# Altium PCB PCB_Robot_Version_1_2_2022-05-04.pcbdoc (part 2 of 2)
Units mil, origin at the board's own origin, x right, y up, seen from the top; angles counter-clockwise.
Board outline 7789.53 x 3844.65 mil, 2 copper layers (Top Layer, Bottom Layer); 136 components, 177 nets, 580 pads, 381 vias.
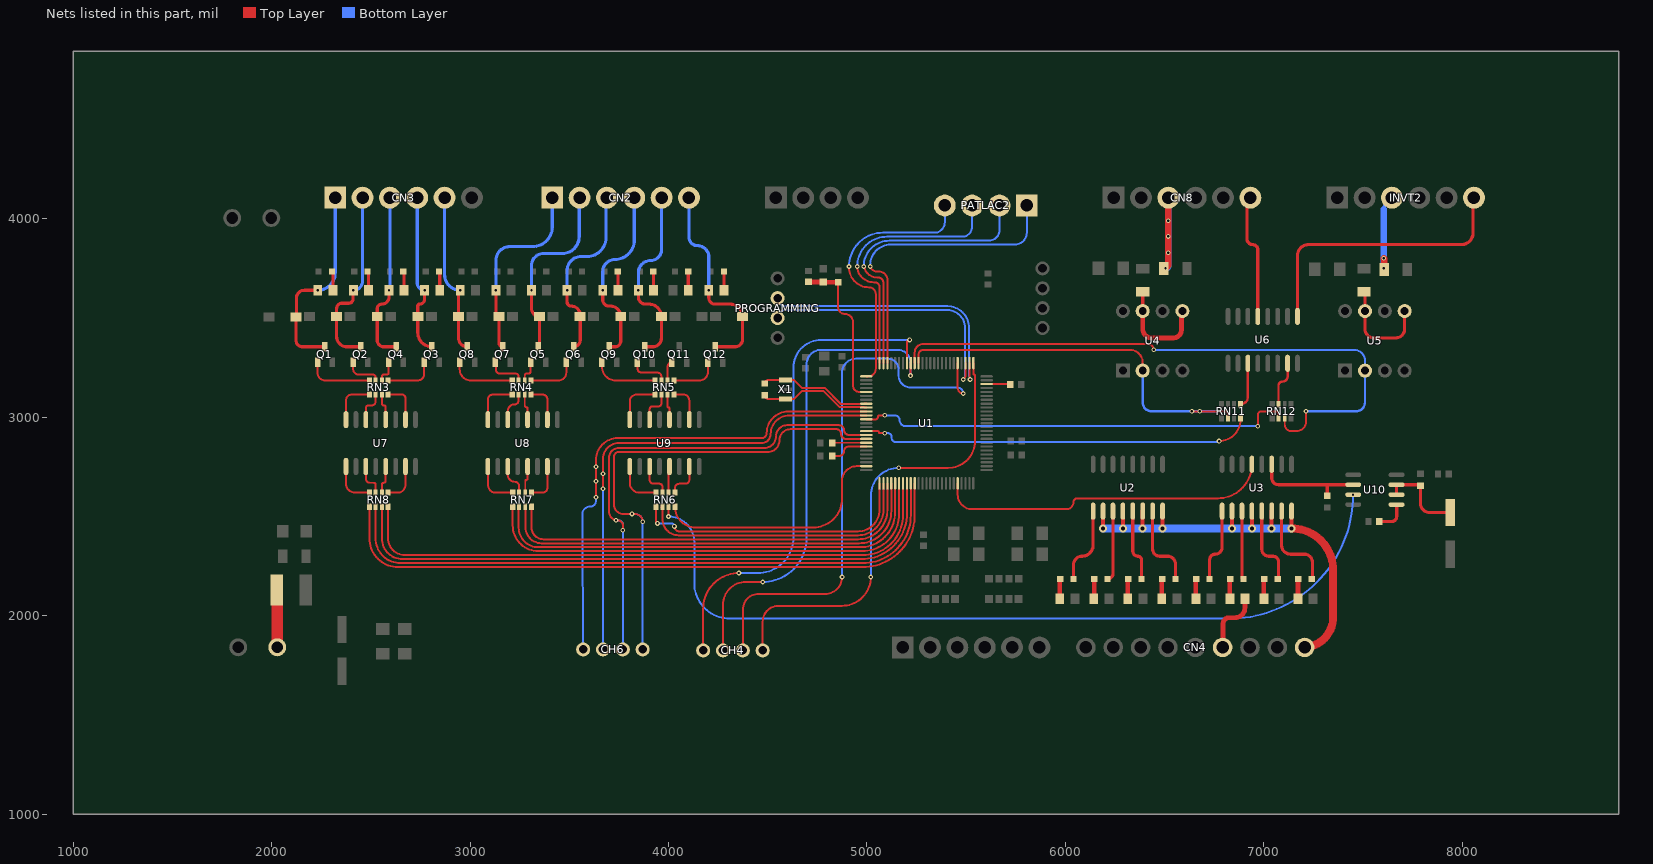
[diagram p2: the nets of this part, all layers, seen from the top]

## Via types
v1: diameter 24, hole 12, Top Layer to Bottom Layer, tented both sides, 310 vias
v2: diameter 32, hole 16, Top Layer to Bottom Layer, tented both sides, 26 vias
v3: diameter 48, hole 24, Top Layer to Bottom Layer, tented both sides, 24 vias
v4: diameter 40, hole 20, Top Layer to Bottom Layer, tented both sides, 21 vias

## Nets (pads, with @x,y where several pads share a name; then routed paths per layer and width w, separated by ;. In a path a pad name is that pad's centre, name@x,y a point inside that pad or via, vN(x,y) a via of type N, cw(c..) or ccw(c..) an arc to the next point about the centre after c; other vN are vias at no path point) (continued)
PHASE_LOSS_IN: R15.2 U3.11 U10.2 | length 553.4
  Top Layer w16: U3.11@7040.08,2762.75 7040.08,2694.65 ccw(c7075.08,2694.65) 7075.08,2659.65 7320.08,2659.65 ; R15.2@7320.08,2604.3 7320.08,2659.65 ; U10.2@7450.08,2659.65 7320.08,2659.65
PHASE_LOSS_OUT: RN6.3 U10.3 | length 4253.7
  Top Layer w10: v1(4000.08,2499.65) 4000.08,2548.47 cw(c4000.83,2548.47) RN6.3@4000.83,2549.21
  Bottom Layer w10: 4015.08,2499.65 v1(4000.08,2499.65) cw(c4000.08,2369.65) 4130.08,2369.65 4130.08,2286.42 4130.08,2164.65 ccw(c4310.08,2164.65) 4310.08,1984.65 6825.08,1984.65 ccw(c6825.08,2609.65) v1(7450.08,2609.65)
PIN_4: CH4.1 U1.1 | length 2308.6
  Top Layer w10: CH4.1@4475.08,1824.65 4475.08,1969.65 cw(c4555.08,1969.65) 4555.08,2049.65 4875.08,2049.65 ccw(c4875.08,2194.65) v1(5020.08,2194.65) ; v1(5160.08,2744.65) 5410.08,2744.65 ccw(c5410.08,2879.65) 5545.08,2879.65 5545.08,3019.65 5545.08,3204.65 5545.08,3209.65 ccw(c5540.08,3209.65) 5540.08,3214.65 cw(c5540.08,3218.43) 5536.3,3218.43 U1.1@5536.3,3272.8
  Bottom Layer w10: v1(5020.08,2194.65) 5020.08,2604.65 cw(c5160.08,2604.65) v1(5160.08,2744.65)
PIN_5: CH4.2 U1.5 | length 2760.8
  Top Layer w10: CH4.2@4375.08,1824.65 4375.08,2029.65 cw(c4455.08,2029.65) 4455.08,2109.65 4790.08,2109.65 ccw(c4790.08,2194.65) v1(4875.08,2194.65) ; U1.5@5457.56,3272.8 5457.56,3147.17 ccw(c5485.08,3147.17) v1(5485.08,3119.65)
  Bottom Layer w10: v1(4875.08,2194.65) 4875.08,3224.65 cw(c4945.08,3224.65) 4945.08,3294.65 5105.08,3294.65 cw(c5105.08,3239.65) 5160.08,3239.65 5160.08,3209.65 ccw(c5220.08,3209.65) 5220.08,3149.65 5350.08,3149.65 5455.08,3149.65 cw(c5455.08,3119.65) v1(5485.08,3119.65)
PIN_8: CH4.3 U1.17 | length 2450
  Top Layer w10: CH4.3@4275.08,1824.65 4275.08,2019.65 4275.08,2054.65 cw(c4390.08,2054.65) 4390.08,2169.65 v1(4475.08,2169.65) ; v1(5220.08,3209.65) 5220.08,3271.54 cw(c5221.34,3271.54) U1.17@5221.34,3272.8
  Bottom Layer w10: v1(4475.08,2169.65) ccw(c4475.08,2389.65) 4695.08,2389.65 4695.08,2929.65 4695.08,3264.65 cw(c4770.08,3264.65) 4770.08,3339.65 5155.08,3339.65 cw(c5155.08,3274.65) 5220.08,3274.65 v1(5220.08,3209.65)
PIN_9: CH4.4 U1.18 | length 2514.9
  Top Layer w10: CH4.4@4175.08,1824.65 4175.08,2034.65 cw(c4355.08,2034.65) v1(4355.08,2214.65) ; U1.18@5201.65,3272.8 5201.65,3376.22 cw(c5215.08,3376.22) v1(5215.08,3389.65)
  Bottom Layer w10: v1(4355.08,2214.65) 4450.08,2214.65 ccw(c4450.08,2394.65) 4630.08,2394.65 4630.08,3249.65 cw(c4770.08,3249.65) 4770.08,3389.65 v1(5215.08,3389.65)
PIN_10: PATLAC2.1 U1.23 | length 1591.2
  Top Layer w10: v1@5015.97,3761.82 ccw(c5050.08,3769.65) 5050.08,3734.65 5060.08,3734.65 cw(c5060.08,3691.5) 5103.23,3691.5 5103.23,3677.71 U1.23@5103.23,3272.8
  Bottom Layer w10: v1(5016.48,3759.65) 5016.48,3766.05 cw(c5120.08,3766.05) 5120.08,3869.65 5745.08,3869.65 ccw(c5745.08,3930.53) 5805.96,3930.53 PATLAC2.1@5805.96,4088.39
PIN_11: PATLAC2.2 U1.24 | length 1479.9
  Top Layer w10: v1@4985.81,3759.94 ccw(c5050.08,3769.65) 5050.08,3704.65 5055.08,3704.65 cw(c5055.08,3676.19) 5083.54,3676.19 U1.24@5083.54,3272.8
  Bottom Layer w10: v1(4983.88,3759.65) cw(c5113.88,3759.65) 5113.88,3889.65 5120.08,3889.65 5615.08,3889.65 ccw(c5615.08,3942.71) 5668.14,3942.71 PATLAC2.2@5668.14,4088.39
PIN_12: PATLAC2.3 U1.25 | length 1380.8
  Top Layer w10: v1@4950.08,3764.65 ccw(c5035.08,3764.65) 5035.08,3679.65 5040.08,3679.65 cw(c5040.08,3655.87) 5063.86,3655.87 U1.25@5063.86,3272.8
  Bottom Layer w10: v1(4951.28,3759.65) cw(c5101.28,3759.65) 5101.28,3909.65 5115.08,3909.65 5480.08,3909.65 ccw(c5480.08,3959.92) 5530.35,3959.92 PATLAC2.3@5530.35,4088.39
PIN_13: PATLAC2.4 U1.26 | length 1373.1
  Top Layer w10: v1@4910.08,3754.23 ccw(c5009.87,3754.23) 5009.87,3654.44 ccw(c5009.87,3654.65) 5010.08,3654.65 cw(c5010.08,3619.65) 5045.08,3619.65 5045.08,3569.65 5045.08,3339.65 5045.08,3299.65 5045.08,3244.65 cw(c5006.3,3244.65) 5006.3,3205.87 U1.26@4996.93,3205.87
  Bottom Layer w10: v1(4910.08,3759.65) cw(c5080.08,3759.65) 5080.08,3929.65 5120.08,3929.65 5340.08,3929.65 ccw(c5340.08,3982.13) 5392.56,3982.13 PATLAC2.4@5392.56,4088.39
PIN_42: CH6.1 U1.42 | length 2539.7
  Top Layer w10: 3766.36,2512.96 ccw(c3766.72,2512.96) 3766.72,2512.61 3794.89,2512.61 v1(3816.22,2512.61) 3831.04,2512.61 cw(c3831.04,2473.57) v1(3870.08,2473.57) ; 3772.12,2512.61 cw(c3772.12,2559.65) 3725.08,2559.65 3725.08,2799.65 cw(c3750.08,2799.65) 3750.08,2824.65 4425.08,2824.65 4500.08,2824.65 ccw(c4500.08,2884.65) 4560.08,2884.65 cw(c4615.08,2884.65) 4615.08,2939.65 4685.08,2939.65 4845.08,2939.65 cw(c4845.08,2914.65) 4870.08,2914.65 ccw(c4893.82,2914.65) 4893.82,2890.91 U1.42@4996.93,2890.91
  Bottom Layer w10: v1(3816.22,2512.61) 3831.04,2512.61 cw(c3831.04,2473.57) v1(3870.08,2473.57) CH6.1@3870.08,1829.65
PIN_43: CH6.2 U1.41 | length 2500.1
  Top Layer w10: v1(3770.08,2429.95) 3770.08,2454.65 ccw(c3745.08,2454.65) 3745.08,2479.65 cw(c3745.08,2524.65) 3700.08,2524.65 3700.08,2531.61 3700.08,2794.65 cw(c3750.08,2794.65) 3750.08,2844.65 4407.65,2844.65 4482.65,2844.65 ccw(c4482.65,2904.65) 4542.65,2904.65 cw(c4597.65,2904.65) 4597.65,2959.65 4667.65,2959.65 4827.65,2959.65 4860.08,2959.65 cw(c4860.08,2934.65) 4885.08,2934.65 ccw(c4909.13,2934.65) 4909.13,2910.6 U1.41@4996.93,2910.59
  Bottom Layer w10: v1(3735.68,2480.64) ccw(c3736.67,2480.64) 3736.67,2479.65 3750.08,2479.65 cw(c3750.08,2459.65) 3770.08,2459.65 v1(3770.08,2429.95) CH6.2@3770.08,1829.65
PIN_48: CH6.3 U1.36 | length 2487.1
  Top Layer w10: v1(3670.08,2639.65) v1(3670.08,2714.65) 3670.08,2789.65 cw(c3750.08,2789.65) 3750.08,2869.65 4470.08,2869.65 ccw(c4470.08,2914.65) 4515.08,2914.65 cw(c4609.45,2914.65) 4609.45,3009.02 U1.36@4996.93,3009.02
  Bottom Layer w10: CH6.3@3670.08,1829.65 v1(3670.08,2639.65) v1(3670.08,2714.65)
PIN_49: CH6.4 U1.35 | length 2828.2
  Top Layer w10: v1@3635.08,2593.11 3635.08,2609.65 ; v1(3635.08,2596.18) v1(3635.08,2750.47) 3635.08,2784.65 cw(c3745.08,2784.65) 3745.08,2894.65 4410.08,2894.65 4470.08,2894.65 ccw(c4470.08,2919.65) 4495.08,2919.65 cw(c4604.14,2919.65) 4604.14,3028.71 U1.35@4996.93,3028.7
  Bottom Layer w10: CH6.4@3570.08,1822.15 3565.98,2467.15 3565.98,2510.55 cw(c3605.08,2510.55) 3605.08,2549.65 ccw(c3605.08,2579.65) 3635.08,2579.65 v1(3635.08,2750.47) v1(3635.08,2677.22) v1(3635.08,2596.18)
POW_OUT1: CN3.1 D2.1 Q1.3 R35.2 | length 1004.2
  Top Layer w16: v1(2232.86,3639.65) 2165.08,3639.65 ccw(c2165.08,3599.65) 2125.08,3599.65 2125.08,3506.34 cw(c2123.39,3506.34) D2.1@2123.38,3504.65 2123.39,3386.34 ccw(c2155.08,3386.34) 2155.08,3354.65 2268.23,3354.65 ccw(c2268.23,3355.51) Q1.3@2269.09,3355.51
  Bottom Layer w16: v1(2232.86,3639.65) ccw(c2232.86,3727.38) 2320.59,3727.38 CN3.1@2320.59,4084.65
POW_OUT2: CN3.2 D3.1 Q2.3 R36.2 | length 917.8
  Top Layer w16: v1(2412.37,3639.65) ccw(c2412.37,3637.36) 2410.08,3637.36 2410.08,3594.65 cw(c2390.08,3594.65) 2390.08,3574.65 2355.08,3574.65 ccw(c2355.08,3547.5) 2327.93,3547.5 D3.1@2327.93,3507.15 2327.93,3406.79 ccw(c2380.08,3406.79) 2380.08,3354.65 2447.32,3354.65 ccw(c2447.32,3355.51) Q2.3@2448.18,3355.51
  Bottom Layer w16: v1(2412.37,3639.65) ccw(c2412.37,3685.67) 2458.39,3685.67 CN3.2@2458.39,4084.65
POW_OUT3: CN3.3 D4.1 Q4.3 R37.2 | length 847.6
  Top Layer w16: v1(2591.87,3639.65) 2591.87,3606.44 cw(c2555.08,3606.44) 2555.08,3569.65 ccw(c2555.08,3547.05) 2532.48,3547.05 D4.1@2532.47,3507.15 2532.48,3387.25 ccw(c2565.08,3387.25) 2565.08,3354.65 2626.41,3354.65 ccw(c2626.41,3355.51) Q4.3@2627.27,3355.51
  Bottom Layer w16: v1(2591.87,3639.65) ccw(c2591.87,3643.95) 2596.18,3643.95 CN3.3@2596.18,4084.65
POW_OUT4: CN3.4 D5.1 Q3.3 R38.2 | length 809.7
  Top Layer w16: v1(2771.37,3639.65) 2771.37,3595.94 cw(c2745.08,3595.94) 2745.08,3569.65 ccw(c2745.08,3561.59) 2737.02,3561.59 D5.1@2737.02,3507.15 2737.02,3424.84 ccw(c2806.36,3424.84) Q3.3@2806.36,3355.51
  Bottom Layer w16: CN3.4@2733.98,4084.65 2733.98,4018.45 2733.98,3677.05 ccw(c2771.37,3677.04) v1(2771.37,3639.65)
POW_OUT5: CN3.5 D6.1 Q8.3 R24.2 | length 804.7
  Top Layer w16: v1(2950.88,3639.65) ccw(c2950.88,3630.34) 2941.57,3630.34 D6.1@2941.56,3507.15 2941.57,3399.39 ccw(c2985.45,3399.39) Q8.3@2985.45,3355.51
  Bottom Layer w16: CN3.5@2871.77,4084.65 2871.77,3718.76 ccw(c2950.88,3718.76) v1(2950.88,3639.65)
POW_OUT6: CN2.1 D7.1 Q7.3 R23.2 | length 960.2
  Top Layer w16: v1(3130.39,3639.65) 3130.39,3522.88 ccw(c3146.12,3522.88) D7.1@3146.11,3507.15 3146.12,3373.94 ccw(c3164.55,3373.94) Q7.3@3164.55,3355.51
  Bottom Layer w16: v1(3130.39,3639.65) 3130.39,3789.95 cw(c3200.08,3789.95) 3200.08,3859.65 3315.08,3859.65 ccw(c3315.08,3959.09) 3414.52,3959.09 CN2.1@3414.52,4084.65
POW_OUT7: CN2.2 D8.1 Q5.3 R22.2 | length 935.6
  Top Layer w16: v1(3309.89,3639.65) 3309.89,3547.92 ccw(c3350.66,3547.92) D8.1@3350.66,3507.15 3350.66,3362.53 cw(c3343.64,3362.53) Q5.3@3343.64,3355.51
  Bottom Layer w16: v1(3309.89,3639.65) 3309.89,3764.45 cw(c3370.08,3764.45) 3370.08,3824.65 3465.08,3824.65 ccw(c3465.08,3909.65) 3550.08,3909.65 3550.08,4082.4 cw(c3552.33,4082.4) CN2.2@3552.33,4084.65
POW_OUT8: CN2.3 D9.1 Q6.3 R21.2 | length 905.3
  Top Layer w16: v1(3489.4,3639.65) 3489.39,3580.33 ccw(c3510.08,3580.33) 3510.08,3559.65 cw(c3510.08,3514.52) D9.1@3555.21,3514.52 ; Q6.3@3522.73,3355.51 ccw(c3522.73,3387.99) 3555.21,3387.99 D9.1@3555.2,3507.15
  Bottom Layer w16: v1(3489.4,3639.65) 3489.39,3738.96 cw(c3560.08,3738.96) 3560.08,3809.65 3590.08,3809.65 ccw(c3590.08,3904.65) 3685.08,3904.65 3685.08,4079.61 cw(c3690.12,4079.61) CN2.3@3690.12,4084.65
POW_OUT9: CN2.4 D10.1 Q9.3 R47.2 | length 921.4
  Top Layer w16: v1(3668.9,3639.65) 3668.89,3590.83 ccw(c3700.08,3590.83) 3700.08,3559.65 3707.25,3559.65 cw(c3707.25,3507.15) 3759.75,3507.15 3759.75,3384.32 cw(c3730.08,3384.32) 3730.08,3354.65 3702.68,3354.65 cw(c3702.68,3355.51) Q9.3@3701.82,3355.51
  Bottom Layer w16: v1(3668.9,3639.65) 3668.89,3733.46 cw(c3730.08,3733.46) 3730.08,3794.65 ccw(c3730.08,3892.49) 3827.92,3892.49 CN2.4@3827.92,4084.65
POW_OUT10: CN2.5 D11.1 Q10.3 R48.2 | length 935.2
  Top Layer w16: v1(3848.4,3639.65) 3848.4,3606.32 ccw(c3885.08,3606.32) 3885.08,3569.65 3901.8,3569.65 cw(c3901.8,3507.15) D11.1@3964.29,3507.15 3964.3,3398.87 cw(c3920.08,3398.87) 3920.08,3354.65 3881.76,3354.65 cw(c3881.76,3355.51) Q10.3@3880.9,3355.51
  Bottom Layer w16: v1(3848.4,3639.65) 3848.4,3727.97 cw(c3910.08,3727.97) 3910.08,3789.65 ccw(c3910.08,3845.28) 3965.71,3845.28 CN2.5@3965.71,4084.65
POWDER_OUT1: RN8.1 U1.60 | length 3300.2
  Top Layer w10: RN8.1@2492.84,2549.22 2492.84,2389.22 ccw(c2637.41,2389.22) 2637.41,2244.65 2825.08,2244.65 4979.17,2244.65 ccw(c4979.17,2506.5) 5241.02,2506.5 U1.60@5241.02,2666.5
POWDER_OUT2: RN8.2 U1.59 | length 3230.6
  Top Layer w10: 2524.33,2389.22 ccw(c2648.9,2389.22) 2648.9,2264.65 4770.08,2264.65 4979.49,2264.65 ccw(c4979.49,2506.5) 5221.34,2506.5 U1.59@5221.34,2666.5 ; RN8.2@2524.33,2549.21 2524.33,2384.88 ccw(c2524.41,2384.88) 2524.41,2384.8
POWDER_OUT3: RN8.3 U1.58 | length 3156
  Top Layer w10: RN8.3@2555.83,2549.21 2555.83,2389.22 ccw(c2660.4,2389.22) 2660.4,2284.65 4720.08,2284.65 4979.8,2284.65 ; 4973,2284.65 ccw(c4973,2513.3) 5201.65,2513.3 U1.58@5201.65,2666.5
POWDER_OUT4: RN8.4 U1.57 | length 3078.1
  Top Layer w10: RN8.4@2587.32,2549.21 2587.32,2389.22 ccw(c2671.89,2389.22) 2671.89,2304.65 2720.08,2304.65 4980.12,2304.65 ccw(c4980.12,2506.5) 5181.97,2506.5 U1.57@5181.97,2666.5
POWDER_OUT5: RN7.1 U1.56 | length 2377.6
  Top Layer w10: RN7.1@3215.34,2549.22 ccw(c3215.34,2548.96) 3215.08,2548.96 3215.08,2454.65 ccw(c3345.08,2454.65) 3345.08,2324.65 4975.08,2324.65 ccw(c4975.08,2511.85) 5162.28,2511.85 U1.56@5162.28,2666.5
POWDER_OUT6: RN7.2 U1.55 | length 2305.8
  Top Layer w10: RN7.2@3246.83,2549.21 ccw(c3246.83,2547.47) 3245.08,2547.47 3245.08,2444.65 ccw(c3345.08,2444.65) 3345.08,2344.65 4965.08,2344.65 ccw(c4965.08,2522.17) 5142.6,2522.17 U1.55@5142.6,2666.5
POWDER_OUT7: RN7.3 U1.54 | length 2226
  Top Layer w10: RN7.3@3278.33,2549.21 cw(c3278.33,2547.47) 3280.08,2547.47 3280.08,2444.65 ccw(c3360.08,2444.65) 3360.08,2364.65 4960.08,2364.65 ccw(c4960.08,2527.48) 5122.91,2527.48 U1.54@5122.91,2666.5
POWDER_OUT8: RN7.4 U1.53 | length 2150.4
  Top Layer w10: RN7.4@3309.82,2549.21 cw(c3309.82,2548.96) 3310.08,2548.96 3310.08,2444.65 ccw(c3370.08,2444.65) 3370.08,2384.65 4955.08,2384.65 ccw(c4955.08,2532.8) 5103.23,2532.8 U1.53@5103.23,2666.5
POWDER_OUT9: RN6.1 U1.51 | length 1447.1
  Top Layer w10: RN6.1@3937.84,2549.22 3937.84,2471.89 ccw(c3945.08,2471.89) v1(3945.08,2464.65) ; v1(4030.08,2449.65) ccw(c4055.08,2449.65) 4055.08,2424.65 4086.71,2424.65 ; 4075.08,2424.65 4120.08,2424.65 4955.08,2424.65 ccw(c4955.08,2533.43) 5063.86,2533.43 U1.51@5063.86,2666.5
  Bottom Layer w10: v1@3955.08,2464.65 v1(3945.08,2464.65) 4015.08,2464.65 cw(c4015.08,2449.65) v1(4030.08,2449.65)
POWDER_OUT10: RN6.2 U1.52 | length 1443.5
  Top Layer w10: U1.52@5083.54,2666.5 5083.54,2533.11 cw(c4955.08,2533.11) 4955.08,2404.65 4051.76,2404.65 cw(c4051.76,2487.07) 3969.33,2487.07 RN6.2@3969.33,2549.21 ; RN6.2@3969.33,2549.21 ccw(c3969.33,2544.97) 3965.08,2544.97 cw(c3969.33,2544.97) RN6.2@3969.33,2549.21
PWM_1: RN11.2 U1.15 U4.2 | length 2064.1
  Top Layer w10: U1.15@5260.71,3272.8 5260.71,3315.28 cw(c5285.08,3315.28) 5285.08,3339.65 6325.08,3339.65 cw(c6325.08,3274.65) 6390.08,3274.65 U4.2@6390.08,3234.65 ; v1(6638.05,3029.65) v1(6678.05,3029.65) 6805.08,3029.65 cw(c6805.08,3015.4) 6819.33,3015.4 RN11.2@6819.33,2994.21
  Bottom Layer w12: U4.2@6390.08,3234.65 6390.08,3074.65 ccw(c6435.08,3074.65) 6435.08,3029.65 v1(6638.05,3029.65) v1(6678.05,3029.65) 6795.08,3029.65
PWM_2: RN12.3 U1.16 U5.2 | length 3166.1
  Top Layer w10: U1.16@5241.02,3272.8 5241.02,3325.59 cw(c5285.08,3325.59) 5285.08,3369.65 5295.08,3369.65 5445.08,3369.65 6025.08,3369.65 6415.08,3369.65 cw(c6415.08,3339.65) v1(6445.08,3339.65) ; RN12.3@7105.83,2994.21 7105.83,2963.9 ccw(c7140.08,2963.9) 7140.08,2929.65 7165.08,2929.65 ccw(c7165.08,2977.26) 7212.69,2977.26 v1(7212.69,3029.65)
  Top Layer w12: RN12.3@7105.08,2993.47 cw(c7105.83,2993.47) RN12.3@7105.83,2994.21
  Bottom Layer w10: v1(6445.08,3339.65) 7455.08,3339.65 cw(c7455.08,3284.65) 7510.08,3284.65 U5.2@7510.08,3234.65
  Bottom Layer w12: v1(7212.69,3029.65) 7465.08,3029.65 ccw(c7465.08,3074.65) 7510.08,3074.65 U5.2@7510.08,3234.65
Q1_1: Q1.1 RN3.8 | length 347.5
  Top Layer w10: Q1.1@2231.68,3276.77 2231.69,3223.04 ccw(c2270.08,3223.04) 2270.08,3184.65 2333.45,3184.65 ccw(c2333.45,3185.08) 2333.88,3185.08 ; 2323.38,3185.08 RN3.8@2492.84,3185.08
Q5_1: Q5.1 RN4.6 | length 113.3
  Top Layer w10: RN4.6@3275.83,3185.08 3275.83,3210.4 cw(c3285.08,3210.4) 3285.08,3219.65 3295.08,3219.65 ccw(c3295.08,3229.65) 3305.08,3229.65 3305.08,3275.61 cw(c3306.24,3275.61) Q5.1@3306.24,3276.77
Q6_1: Q6.1 RN4.5 | length 252.6
  Top Layer w10: RN4.5@3307.32,3185.07 3445.51,3185.08 ccw(c3445.51,3224.65) 3485.08,3224.65 3485.08,3276.52 cw(c3485.33,3276.52) Q6.1@3485.32,3276.77
Q7_1: Q7.1 RN4.7 | length 194.1
  Top Layer w10: Q7.1@3127.14,3276.77 cw(c3127.15,3273.84) 3130.08,3273.84 3130.08,3239.65 ccw(c3150.08,3239.65) 3150.08,3219.65 3230.08,3219.65 cw(c3230.08,3205.4) 3244.33,3205.4 RN4.7@3244.33,3185.08 ccw(c3244.33,3185.83) RN4.7@3245.08,3185.83
Q9_1: Q9.1 RN5.8 | length 330.5
  Top Layer w10: Q9.1@3664.41,3276.77 3664.42,3255.31 ccw(c3735.08,3255.31) 3735.08,3184.65 3932.41,3184.65 ccw(c3932.41,3185.08) RN5.8@3932.84,3185.08
R5_2: LED13.1 R5.2 | length 101.4
  Top Layer w24: R5.2@5972.04,2084.65 5972.04,2182.25 cw(c5974.44,2182.25) LED13.1@5974.44,2184.65
R6_2: LED14.1 R6.2 | length 101.4
  Top Layer w24: R6.2@6143.47,2084.65 ccw(c6143.47,2087.05) 6145.87,2087.05 LED14.1@6145.86,2184.65
R7_2: LED15.1 R7.2 | length 101.4
  Top Layer w24: R7.2@6314.89,2084.65 6314.9,2182.26 cw(c6317.29,2182.26) LED15.1@6317.29,2184.65
R8_2: LED16.1 R8.2 | length 101.4
  Top Layer w24: R8.2@6486.32,2084.65 6486.33,2182.26 cw(c6488.72,2182.26) LED16.1@6488.72,2184.65
R9_1: LED11.1 R9.1 | length 95.3
  Top Layer w16: R9.1@4099.48,3639.65 4099.48,3734.19 cw(c4099.94,3734.19) LED11.1@4099.94,3734.65
R10_1: LED12.1 R10.1 | length 95
  Top Layer w16: LED12.1@4279.45,3734.65 cw(c4279.45,3734.61) 4279.48,3734.61 R10.1@4279.48,3639.65
R30_2: LED20.1 R30.2 | length 101.4
  Top Layer w24: R30.2@6657.75,2084.65 6657.75,2182.25 cw(c6660.15,2182.25) LED20.1@6660.15,2184.65
R33_2: R33.2 U5.5 U5.7 | length 531
  Top Layer w16: R33.2@7505.08,3631.43 cw(c7505.08,3626.43) 7510.08,3626.43 U5.7@7510.08,3534.65 7510.08,3444.65 ccw(c7555.08,3444.65) 7555.08,3399.65 7665.08,3399.65 ccw(c7665.08,3444.65) 7710.08,3444.65 U5.5@7710.08,3534.65
R34_2: R34.2 U4.5 U4.7 | length 528.2
  Top Layer w16: U4.7@6390.08,3534.65 R34.2@6390.08,3631.43
  Top Layer w24: U4.7@6390.08,3534.65 6390.08,3444.65 ccw(c6435.08,3444.65) 6435.08,3399.65 6545.08,3399.65 ccw(c6545.08,3439.65) 6585.08,3439.65 6585.08,3529.65 cw(c6590.08,3529.65) U4.5@6590.08,3534.65
R35_1: LED1.1 R35.1 | length 97.9
  Top Layer w16: LED1.1@2303.95,3734.65 cw(c2303.95,3729.65) 2308.95,3729.65 R35.1@2308.95,3639.65
R36_1: LED2.1 R36.1 | length 97.6
  Top Layer w16: LED2.1@2483.95,3734.65 cw(c2483.95,3730.14) 2488.46,3730.14 R36.1@2488.45,3639.65
R37_1: LED3.1 R37.1 | length 97.3
  Top Layer w16: LED3.1@2663.95,3734.65 cw(c2663.95,3730.64) 2667.95,3730.64 R37.1@2667.96,3639.65
R38_1: LED4.1 R38.1 | length 97
  Top Layer w16: LED4.1@2843.95,3734.65 cw(c2843.95,3731.13) 2847.46,3731.13 R38.1@2847.46,3639.65
R41_2: LED19.1 R41.2 | length 101.4
  Top Layer w24: R41.2@6829.18,2084.65 6829.18,2182.25 cw(c6831.58,2182.25) LED19.1@6831.58,2184.65
R42_2: LED17.1 R42.2 | length 101.4
  Top Layer w24: R42.2@7000.61,2084.65 7000.61,2182.25 cw(c7003.01,2182.25) LED17.1@7003.01,2184.65
R45_2: LED18.1 R45.2 | length 101.4
  Top Layer w24: R45.2@7172.04,2084.65 7172.04,2182.25 cw(c7174.44,2182.25) LED18.1@7174.44,2184.65
R47_1: LED9.1 R47.1 | length 95.6
  Top Layer w16: LED9.1@3743.95,3734.65 cw(c3743.95,3733.61) 3744.99,3733.61 R47.1@3744.98,3639.65
R48_1: LED10.1 R48.1 | length 95.3
  Top Layer w16: LED10.1@3923.95,3734.65 cw(c3923.95,3734.11) 3924.48,3734.11 R48.1@3924.49,3639.65
RESET: C7.1 D1.2 R2.1 U1.30 | length 799.8
  Top Layer w10: R2.1@4855.08,3679.99 4855.08,3554.65 ccw(c4890.08,3554.65) 4890.08,3519.65 cw(c4890.08,3479.65) 4930.08,3479.65 4930.08,3399.65 4930.08,3159.65 ccw(c4962.6,3159.65) 4962.6,3127.13 U1.30@4996.93,3127.13
  Top Layer w24: C7.1@4705.08,3682.09 ccw(c4705.99,3682.09) 4705.99,3681.18 D1.2@4780.08,3681.18 ccw(c4781.27,3681.18) 4781.27,3679.99 R2.1@4855.08,3679.99
REV_1: CN8.6 U6.13 | length 622.1
  Top Layer w16: CN8.6@6932.66,4088.39 ccw(c6932.66,4070.81) 6915.08,4070.81 6915.08,3919.65 6915.08,3899.65 ccw(c6945.08,3899.65) 6945.08,3869.65 cw(c6945.08,3844.65) 6970.08,3844.65 U6.13@6970.08,3507.75
REV_2: INVT2.6 U6.9 | length 1418.8
  Top Layer w16: U6.9@7170.08,3507.75 7170.08,3814.65 cw(c7225.08,3814.65) 7225.08,3869.65 7995.08,3869.65 ccw(c7995.08,3929.65) 8055.08,3929.65 8055.08,4083.9 cw(c8059.57,4083.9) INVT2.6@8059.57,4088.39
REVERSE_1: RN11.4 U1.40 | length 2007.3
  Top Layer w10: U1.40@4996.93,2930.28 ccw(c4997.56,2930.28) 4997.56,2929.65 5050.08,2929.65 5055.08,2929.65 cw(c5055.08,2924.65) 5060.08,2924.65 ccw(c5065.08,2924.65) 5065.08,2919.65 v1(5090.08,2919.65) ; v1(6775.08,2879.65) ccw(c6775.08,2986.89) 6882.32,2986.89 RN11.4@6882.32,2994.21
  Bottom Layer w10: v1(5090.08,2919.65) 5105.08,2919.65 cw(c5105.08,2899.65) 5125.08,2899.65 5125.08,2894.65 ccw(c5145.08,2894.65) 5145.08,2874.65 5200.08,2874.65 5213.92,2874.65 6760.08,2874.65 ; 6743.44,2874.65 6770.08,2874.65 ccw(c6770.08,2879.65) v1(6775.08,2879.65)
REVERSE_2: RN12.2 U1.37 | length 2238
  Top Layer w10: U1.37@4996.93,2989.33 5044.77,2989.34 ccw(c5044.77,2999.65) 5055.08,2999.65 cw(c5065.08,2999.65) 5065.08,3009.65 v1(5090.08,3009.65) ; v1(6970.08,2954.65) 6970.08,3009.65 cw(c6990.08,3009.65) 6990.08,3029.65 7050.08,3029.65 7055.08,3029.65 cw(c7055.08,3010.4) 7074.33,3010.4 RN12.2@7074.33,2994.21 cw(c7074.33,2993.47) RN12.2@7075.08,2993.47
  Bottom Layer w10: v1(5090.08,3009.65) 5140.08,3009.65 cw(c5140.08,2984.65) 5165.08,2984.65 ccw(c5195.08,2984.65) 5195.08,2954.65 5206.03,2954.65 ; 5216.94,2954.65 5200.08,2954.65 v1(6970.08,2954.65)
RN3_5: Q3.1 RN3.5 | length 259.5
  Top Layer w10: RN3.5@2587.32,3185.07 2677.27,3185.08 2734.65,3185.08 cw(c2734.65,3184.65) 2735.08,3184.65 ccw(c2735.08,3218.53) 2768.96,3218.53 Q3.1@2768.96,3276.77
RN3_6: Q4.1 RN3.6 | length 118.7
  Top Layer w10: RN3.6@2555.08,3185.83 ccw(c2555.83,3185.83) RN3.6@2555.83,3185.08 2555.83,3205.4 cw(c2565.08,3205.4) 2565.08,3214.65 2580.08,3214.65 ccw(c2580.08,3224.44) 2589.87,3224.44 Q4.1@2589.87,3276.77
RN3_7: Q2.1 RN3.7 | length 210.5
  Top Layer w10: Q2.1@2410.78,3253.95 Q2.1@2410.78,3276.77 2410.78,3243.95 ccw(c2440.08,3243.95) 2440.08,3214.65 2510.08,3214.65 cw(c2510.08,3200.4) 2524.33,3200.4 RN3.7@2524.33,3185.08 ccw(c2524.33,3185.83) RN3.7@2525.08,3185.83
RN4_1: RN4.1 U8.16 | length 238.7
  Top Layer w10: U8.16@3090.08,2987.75 3090.08,3089.65 cw(c3114.65,3089.65) 3114.65,3114.22 RN4.1@3212.84,3114.22
RN4_2: RN4.2 U8.14 | length 157.4
  Top Layer w10: U8.14@3190.08,2987.75 3190.08,3029.65 cw(c3225.08,3029.65) 3225.08,3064.65 ccw(c3225.08,3083.9) 3244.33,3083.9 RN4.2@3244.33,3114.21
RN4_3: RN4.3 U8.12 | length 134.6
  Top Layer w10: RN4.3@3275.83,3114.21 3275.83,3058.9 ccw(c3285.08,3058.9) 3285.08,3049.65 cw(c3285.08,3044.65) 3290.08,3044.65 U8.12@3290.08,2987.75
RN4_4: RN4.4 U8.10 | length 198.7
  Top Layer w10: RN4.4@3307.32,3114.21 3365.51,3114.22 cw(c3365.51,3089.65) 3390.08,3089.65 U8.10@3390.08,2987.75
RN4_8: Q8.1 RN4.8 | length 332.4
  Top Layer w10: Q8.1@2948.05,3276.77 2948.05,3241.68 ccw(c3005.08,3241.68) 3005.08,3184.65 3039.74,3185.08 RN4.8@3212.84,3185.08
RN5_1: RN5.1 U9.16 | length 239.4
  Top Layer w10: U9.16@3805.08,2987.75 3805.08,3079.65 cw(c3839.65,3079.65) 3839.65,3114.22 RN5.1@3932.84,3114.22
RN5_2: RN5.2 U9.14 | length 173.2
  Top Layer w10: U9.14@3905.08,2987.75 3905.08,3039.65 cw(c3920.08,3039.65) 3920.08,3054.65 3950.08,3054.65 ccw(c3950.08,3068.9) 3964.33,3068.9 RN5.2@3964.33,3114.21
RN5_3: RN5.3 U9.12 | length 131.7
  Top Layer w10: RN5.3@3995.83,3114.21 3995.83,3053.9 ccw(c4000.08,3053.9) 4000.08,3049.65 cw(c4000.08,3044.65) 4005.08,3044.65 U9.12@4005.08,2987.75
RN5_4: RN5.4 U9.10 | length 191.5
  Top Layer w10: RN5.4@4027.32,3114.21 4075.51,3114.22 cw(c4075.51,3084.65) 4105.08,3084.65 U9.10@4105.08,2987.75
RN5_5: Q12.1 RN5.5 | length 246.5
  Top Layer w10: RN5.5@4027.32,3185.07 4155.51,3185.08 ccw(c4155.51,3229.65) 4200.08,3229.65 4200.08,3274.78 ccw(c4198.09,3274.78) Q12.1@4198.09,3276.77
RN5_6: Q11.1 RN5.6 | length 104.2
  Top Layer w10: RN5.6@3995.83,3185.08 3995.83,3254.92 cw(c4017.68,3254.92) Q11.1@4017.68,3276.77
RN5_7: Q10.1 RN5.7 | length 211.7
  Top Layer w10: Q10.1@3843.5,3261.23 Q10.1@3843.5,3276.77 3843.5,3246.23 ccw(c3865.08,3246.23) 3865.08,3224.65 3945.08,3224.65 cw(c3945.08,3205.4) 3964.33,3205.4 RN5.7@3964.33,3185.08 ccw(c3964.33,3185.83) RN5.7@3965.08,3185.83
RV1: RN11.5 U6.3 | length 228
  Top Layer w12: RN11.5@6882.32,3065.07 ccw(c6882.32,3102.84) 6920.08,3102.84 U6.3@6920.08,3271.53
RV2: RN12.7 U6.7 | length 232.6
  Top Layer w12: RN12.7@7074.33,3065.08 7074.33,3158.9 cw(c7095.08,3158.9) 7095.08,3179.65 ccw(c7095.08,3204.65) 7120.08,3204.65 U6.7@7120.08,3271.53
RX: PROGRAMMING.2 U1.2 | length 1393.9
  Top Layer w10: U1.2@5516.61,3272.8 5516.61,3208.12 ccw(c5535.08,3208.12) v1@5523.43,3193.78
  Bottom Layer w10: PROGRAMMING.2@4550.08,3599.65 ccw(c4590.08,3599.65) 4590.08,3559.65 4715.08,3559.65 4755.08,3559.65 5385.08,3559.65 5405.08,3559.65 cw(c5405.08,3449.65) 5515.08,3449.65 5515.08,3209.65 ccw(c5535.08,3209.65) v1@5526.13,3191.76
  other v1: 5520.08,3189.65
SCL: R4.1 U1.43 | length 172.8
  Top Layer w10: R4.1@4824.73,2869.65 4826.32,2871.23 U1.43@4996.93,2871.22
SDA: R3.1 U1.44 | length 199
  Top Layer w10: R3.1@4824.73,2804.65 4860.08,2804.65 ccw(c4860.08,2829.65) 4885.08,2829.65 cw(c4906.97,2829.65) 4906.97,2851.54 U1.44@4996.93,2851.54
SUCTION: RN6.4 U1.49 | length 1239
  Top Layer w10: RN6.4@4032.32,2549.21 ccw(c4136.89,2549.22) 4136.89,2444.65 4730.08,2444.65 ccw(c4730.08,2589.65) 4875.08,2589.65 4875.08,2679.65 cw(c4948.55,2679.65) 4948.55,2753.12 U1.49@4996.93,2753.11
SUCTION_OUT: CN2.6 D13.1 Q12.3 R10.2 | length 1038.5
  Top Layer w16: v1(4203.4,3639.65) 4203.4,3601.32 ccw(c4235.08,3601.32) 4235.08,3569.65 4295.08,3569.65 4310.89,3569.65 cw(c4310.89,3507.15) D13.1@4373.38,3507.15 4373.39,3392.96 cw(c4335.08,3392.96) 4335.08,3354.65 4236.35,3354.65 cw(c4236.35,3355.51) Q12.3@4235.49,3355.51
  Bottom Layer w16: CN2.6@4103.51,4084.65 4103.51,3906.22 ccw(c4145.08,3906.22) 4145.08,3864.65 cw(c4145.08,3806.32) 4203.4,3806.32 v1(4203.4,3639.65)
THERMAL: CN4.6 R41.1 | length 306.7
  Top Layer w24: CN4.6@6796.77,1854.65 cw(c6796.77,1856.34) 6795.08,1856.34 6795.08,1959.65 cw(c6825.08,1959.65) 6825.08,1989.65 6855.08,1989.65 ccw(c6855.08,2039.84) 6905.27,2039.84 R41.1@6905.27,2084.65
THERMAL_IN: U1.71 U3.13 | length 1710.6
  Top Layer w10: U1.71@5457.56,2666.5 5457.56,2609.62 ccw(c5530.93,2609.62) 5530.93,2536.26 6005.93,2536.26 ccw(c6005.93,2571.26) 6040.93,2571.26 cw(c6060.93,2571.26) 6060.93,2591.26 6081.25,2591.26 6768.59,2591.26 ccw(c6768.59,2762.75) U3.13@6940.08,2762.75
TX: PROGRAMMING.3 U1.3 | length 1367.6
  Top Layer w10: v1@5484.17,3191.63 ccw(c5475.08,3211.5) 5496.93,3211.5 U1.3@5496.93,3272.8
  Bottom Layer w10: PROGRAMMING.3@4550.08,3499.65 cw(c4590.08,3499.65) 4590.08,3539.65 4735.08,3539.65 5405.08,3539.65 cw(c5405.08,3449.65) 5495.08,3449.65 5495.08,3209.65 cw(c5475.08,3209.65) v1@5484.02,3191.76
  other v1: 5485.08,3189.65
U1_98: C1.2 U1.98 | length 120.3
  Top Layer w10: U1.98@5603.23,3166.5 5720.67,3166.5 cw(c5720.67,3164.65) C1.2@5722.52,3164.65
U1GND: CN8.3 R12.1 | length 741.8
  Top Layer w16: CN8.3@6496.86,4065.98 cw(c6519.27,4065.98) CN8.3@6519.27,4088.39
  Top Layer w32: v1(6505.08,3749.65) R12.1@6496.86,3749.65 ccw(c6496.86,3772.06) 6519.27,3772.06 v1(6519.27,3828.49) v1(6519.27,3911.16) v1(6519.27,3989.82) CN8.3@6519.27,4088.39
  Bottom Layer w32: v1(6505.08,3749.65) ccw(c6505.08,3763.84) 6519.27,3763.84 CN8.3@6519.27,4088.39
U2_1: LED13.2 U2.1 | length 398.2
  Top Layer w16: LED13.2@6041.44,2184.65 6041.44,2256.01 cw(c6085.08,2256.01) 6085.08,2299.65 ccw(c6085.08,2354.65) 6140.08,2354.65 U2.1@6140.08,2526.53
U2_3: LED14.2 U2.3 | length 357.4
  Top Layer w16: LED14.2@6212.86,2184.65 ccw(c6212.87,2211.86) 6240.08,2211.86 U2.3@6240.08,2526.53
U2_5: LED15.2 U2.5 | length 367.1
  Top Layer w16: U2.5@6340.08,2526.53 6340.08,2324.65 ccw(c6365.08,2324.65) 6365.08,2299.65 cw(c6365.08,2280.44) 6384.29,2280.44 LED15.2@6384.29,2184.65
U2_7: LED16.2 U2.7 | length 425.1
  Top Layer w16: U2.7@6440.08,2526.53 6440.08,2334.65 ccw(c6475.08,2334.65) 6475.08,2299.65 6515.08,2299.65 cw(c6515.08,2259.65) 6555.08,2259.65 6555.08,2185.29 ccw(c6555.72,2185.29) LED16.2@6555.72,2184.65
U2GND: INVT2.3 R11.1 | length 513.6
  Top Layer w32: v1(7605.08,3800.68) cw(c7605.08,3798.9) 7606.86,3798.9 R11.1@7606.86,3744.65
  Bottom Layer w16: v1(7605.08,3749.65) v1(7605.08,3800.68) 7605.08,3819.65 ; 7605.08,4047.29 cw(c7646.18,4047.29) INVT2.3@7646.18,4088.39
  Bottom Layer w32: v1(7605.08,3749.65) 7605.08,3844.04 ; 7605.08,3819.65 7605.08,4047.29
U3_1: LED20.2 U3.1 | length 377.8
  Top Layer w16: LED20.2@6727.15,2184.65 6727.15,2281.72 cw(c6755.08,2281.72) 6755.08,2309.65 ccw(c6755.08,2344.65) 6790.08,2344.65 U3.1@6790.08,2526.53
U3_3: LED19.2 U3.3 | length 346.7
  Top Layer w16: U3.3@6890.08,2526.53 6890.08,2193.15 ccw(c6898.58,2193.15) LED19.2@6898.58,2184.65
U3_5: LED17.2 U3.5 | length 401.9
  Top Layer w16: U3.5@6990.08,2526.53 6990.08,2334.65 ccw(c7025.08,2334.65) 7025.08,2299.65 7045.08,2299.65 cw(c7045.08,2269.65) 7075.08,2269.65 7075.08,2189.72 cw(c7070.01,2189.72) LED17.2@7070.01,2184.65
U3_7: LED18.2 U3.7 | length 462.5
  Top Layer w16: U3.7@7090.08,2526.53 7090.08,2354.65 ccw(c7135.08,2354.65) 7135.08,2309.65 7205.08,2309.65 cw(c7205.08,2269.65) 7245.08,2269.65 7245.08,2188.29 cw(c7241.44,2188.29) LED18.2@7241.44,2184.65
U7_1: RN8.8 U7.1 | length 230.6
  Top Layer w10: U7.1@2375.08,2751.53 2375.08,2664.65 ccw(c2420.08,2664.65) 2420.08,2619.65 2492.41,2619.65 ccw(c2492.41,2620.08) RN8.8@2492.84,2620.08
U7_3: RN8.7 U7.3 | length 168.2
  Top Layer w10: U7.3@2475.08,2751.53 2475.08,2689.65 ccw(c2495.08,2689.65) 2495.08,2669.65 2515.08,2669.65 cw(c2515.08,2660.4) 2524.33,2660.4 RN8.7@2524.33,2620.08
U7_5: RN8.6 U7.5 | length 142.4
  Top Layer w10: RN8.6@2555.83,2620.08 2555.83,2660.4 cw(c2565.08,2660.4) 2565.08,2669.65 ccw(c2565.08,2679.65) 2575.08,2679.65 U7.5@2575.08,2751.53
U7_7: RN8.5 U7.7 | length 202.7
  Top Layer w10: RN8.5@2587.32,2620.07 ccw(c2587.75,2620.08) 2587.75,2619.65 2635.08,2619.65 ccw(c2635.08,2659.65) 2675.08,2659.65 U7.7@2675.08,2751.53
U7_10: RN3.4 U7.10 | length 205.8
  Top Layer w10: RN3.4@2587.32,3114.21 2655.51,3114.22 cw(c2655.51,3094.65) 2675.08,3094.65 U7.10@2675.08,2987.75
U7_12: RN3.3 U7.12 | length 137.5
  Top Layer w10: RN3.3@2555.83,3114.21 2555.83,3068.9 ccw(c2565.08,3068.9) 2565.08,3059.65 cw(c2565.08,3049.65) 2575.08,3049.65 U7.12@2575.08,2987.75
U7_14: RN3.2 U7.14 | length 161
  Top Layer w10: U7.14@2475.08,2987.75 2475.08,3044.65 cw(c2490.08,3044.65) 2490.08,3059.65 2505.08,3059.65 ccw(c2505.08,3078.9) 2524.33,3078.9 RN3.2@2524.33,3114.21
U7_16: RN3.1 U7.16 | length 231.5
  Top Layer w10: U7.16@2375.08,2987.75 2375.08,3084.65 cw(c2404.65,3084.65) 2404.65,3114.22 RN3.1@2492.84,3114.22
U8_1: RN7.8 U8.1 | length 240.2
  Top Layer w10: U8.1@3090.08,2751.53 3090.08,2659.65 ccw(c3130.08,2659.65) 3130.08,2619.65 3214.91,2619.65 ccw(c3214.91,2620.08) RN7.8@3215.34,2620.08
U8_3: RN7.7 U8.3 | length 163.9
  Top Layer w10: U8.3@3190.08,2751.53 3190.08,2709.65 ccw(c3225.08,2709.65) 3225.08,2674.65 cw(c3225.08,2652.9) 3246.83,2652.9 RN7.7@3246.83,2620.08
U8_5: RN7.6 U8.5 | length 138.2
  Top Layer w10: RN7.6@3278.33,2620.08 3278.33,2677.9 cw(c3285.08,2677.9) 3285.08,2684.65 ccw(c3285.08,2689.65) 3290.08,2689.65 U8.5@3290.08,2751.53
U8_7: RN7.5 U8.7 | length 201.7
  Top Layer w10: RN7.5@3309.82,2620.07 ccw(c3310.25,2620.08) 3310.25,2619.65 3365.08,2619.65 ccw(c3365.08,2644.65) 3390.08,2644.65 U8.7@3390.08,2751.53
U9_1: RN6.8 U9.1 | length 243.4
  Top Layer w10: U9.1@3805.08,2751.53 3805.08,2669.65 ccw(c3855.08,2669.65) 3855.08,2619.65 3937.41,2619.65 ccw(c3937.41,2620.08) RN6.8@3937.84,2620.08
U9_3: RN6.7 U9.3 | length 181
  Top Layer w10: U9.3@3905.08,2751.53 3905.08,2684.65 ccw(c3925.08,2684.65) 3925.08,2664.65 3955.08,2664.65 cw(c3955.08,2650.4) 3969.33,2650.4 RN6.7@3969.33,2620.08
U9_5: RN6.6 U9.5 | length 133.9
  Top Layer w10: RN6.6@4000.83,2620.08 4000.83,2747.29 cw(c4005.08,2747.29) U9.5@4005.08,2751.53
U9_7: RN6.5 U9.7 | length 185.9
  Top Layer w10: RN6.5@4032.32,2620.07 4032.32,2641.89 cw(c4055.08,2641.89) 4055.08,2664.65 4085.08,2664.65 ccw(c4085.08,2684.65) 4105.08,2684.65 U9.7@4105.08,2751.53
U10_5: C18.2 U10.5 | length 162.2
  Top Layer w16: C18.2@7582.63,2474.65 7645.08,2474.65 ccw(c7645.08,2499.65) 7670.08,2499.65 7670.08,2558.8 ccw(c7669.23,2558.8) U10.5@7669.23,2559.65
U10_7: C19.1 R13.2 U10.6 U10.7 | length 439.5
  Top Layer w16: U10.6@7669.23,2609.65 U10.7@7669.23,2659.65 7785.42,2659.65 cw(c7785.42,2654.99) R13.2@7790.08,2654.99 7790.08,2564.65 ccw(c7834.96,2564.65) 7834.96,2519.77 C19.1@7940.08,2519.76
UGND: CN4.9 U2.2 U2.4 U2.6 U2.8 U3.2 U3.4 U3.6 U3.8 | length 2452.8
  Top Layer w20: v4(6190.08,2439.65) U2.2@6190.08,2526.53 ; v4(6290.08,2439.65) U2.4@6290.08,2526.53 ; v4(6390.08,2439.65) U2.6@6390.08,2526.53 ; v4(6490.08,2439.65) U2.8@6490.08,2526.53 ; v4(6840.08,2439.65) U3.2@6840.08,2526.53 ; v4(6940.08,2439.65) U3.4@6940.08,2526.53 ; v4(7040.08,2439.65) U3.6@7040.08,2526.53 ; v4(7140.08,2439.65) U3.8@7140.08,2526.53
  Top Layer w40: v4(7140.08,2439.65) cw(c7140.08,2229.65) 7350.08,2229.65 7350.08,1993.46 cw(c7196.26,1993.46) CN4.9@7196.26,1839.65
  Bottom Layer w40: v4(6190.08,2439.65) v4(6290.08,2439.65) v4(6390.08,2439.65) v4(6490.08,2439.65) v4(6840.08,2439.65) v4(6940.08,2439.65) v4(7040.08,2439.65) v4(7140.08,2439.65)
VCC: 5VIN.1 F2.2 | length 290
  Top Layer w60: F2.2@2027.11,2129.65 cw(c2027.11,2128.26) 2028.5,2128.26 5VIN.1@2028.51,1840.39
XTAL+: R1.2 U1.34 X1.3 | length 572.6
  Top Layer w10: R1.2@4485.08,3109.99 ccw(c4502.66,3109.99) 4502.66,3092.41 X1.3@4590.07,3092.4 4633.54,3092.41 4672.78,3131.65 4712.78,3131.65 4781.6,3131.65 4863.01,3050.23 4945.08,3050.23 4985.08,3050.23 4986.93,3048.39 U1.34@4996.93,3048.39
XTAL-: R1.1 U1.33 X1.1 | length 572.6
  Top Layer w10: R1.1@4485.08,3169.3 cw(c4502.66,3169.31) 4502.66,3186.89 X1.1@4590.08,3186.89 4633.54,3186.89 4672.78,3147.65 4712.78,3147.65 4788.23,3147.65 4869.64,3066.23 4945.08,3066.23 4985.08,3066.23 4986.93,3068.08 U1.33@4996.93,3068.07
pads on no net: U1.4 U1.8 U1.9 U1.14 U1.27 U1.28 U1.29 U1.45 U1.46 U1.47 U1.48 U1.50 U1.65 U1.66 U1.67 U1.68 U1.69 U1.70 U1.78 U1.79 U1.82 U1.83 U1.84 U1.85 U1.86 U1.87 U1.88 U1.89 U1.90 U1.91 U1.92 U1.93 U1.94 U1.95 U1.96 U1.97

## Polygon pours and split planes (outlines as drawn)
PGND on Bottom Layer (solid): 2065.93,3921.26 2065.93,4001.26 ccw(c2005.93,4001.26) 2005.93,4061.26 1985.93,4061.26 ccw(c1985.93,4001.26) 1925.93,4001.26 1925.93,3541.26 ccw(c2005.93,3541.26) 2005.93,3461.26 4225.93,3461.26 ccw(c4225.93,3521.26) 4285.93,3521.26 4285.93,3541.26 cw(c4345.93,3541.26) 4345.93,3601.26 ccw(c4345.93,3621.26) 4365.93,3621.26 4365.93,3721.26 4365.93,3741.26 ccw(c4305.93,3741.26) 4305.93,3801.26 2145.93,3801.26 2125.93,3801.26 cw(c2125.93,3861.26) 2065.93,3861.26
GND on Bottom Layer (solid): 8280.93,1631.26 cw(c8155.93,1631.26) 8155.93,1506.26 1610.93,1506.26 cw(c1610.93,1611.26) 1505.93,1611.26 1505.93,2741.26 cw(c1580.93,2741.26) 1580.93,2816.26 4325.93,2816.26 ccw(c4325.93,2956.26) 4465.93,2956.26 4465.93,3701.26 cw(c4595.93,3701.26) 4595.93,3831.26 5885.93,3831.26 cw(c5885.93,3696.26) 6020.93,3696.26 6020.93,3586.26 ccw(c6260.93,3586.26) 6260.93,3346.26 8080.93,3346.26 cw(c8080.93,3146.26) 8280.93,3146.26 8280.93,1631.26
+24V on Bottom Layer (solid): 1855.93,3931.26 1855.93,4001.26 ccw(c1795.93,4001.26) 1795.93,4061.26 1790.93,4061.26 ccw(c1790.93,3996.26) 1725.93,3996.26 1725.93,3451.26 ccw(c1930.93,3451.26) 1930.93,3246.26 4325.93,3246.26 ccw(c4325.93,3306.26) 4385.93,3306.26 4385.93,3341.26 ccw(c4320.93,3341.26) 4320.93,3406.26 1945.93,3406.26 cw(c1945.93,3501.26) 1850.93,3501.26
PGND on Top Layer (solid): 2065.08,3919.65 2065.08,3999.65 ccw(c2005.08,3999.65) 2005.08,4059.65 1985.08,4059.65 ccw(c1985.08,3999.65) 1925.08,3999.65 1925.08,3539.65 ccw(c2005.08,3539.65) 2005.08,3459.65 4225.08,3459.65 ccw(c4225.08,3519.65) 4285.08,3519.65 4285.08,3539.65 cw(c4345.08,3539.65) 4345.08,3599.65 ccw(c4345.08,3619.65) 4365.08,3619.65 4365.08,3719.65 4365.08,3739.65 ccw(c4305.08,3739.65) 4305.08,3799.65 2145.08,3799.65 2125.08,3799.65 cw(c2125.08,3859.65) 2065.08,3859.65
+24V on Top Layer (solid): 1860.08,3929.65 1860.08,3999.65 ccw(c1800.08,3999.65) 1800.08,4059.65 1795.08,4059.65 ccw(c1795.08,3994.65) 1730.08,3994.65 1730.08,3449.65 ccw(c1935.08,3449.65) 1935.08,3244.65 4330.08,3244.65 ccw(c4330.08,3304.65) 4390.08,3304.65 4390.08,3339.65 ccw(c4325.08,3339.65) 4325.08,3404.65 1950.08,3404.65 cw(c1950.08,3499.65) 1855.08,3499.65
GND on Top Layer (solid): 8280.93,1631.26 cw(c8155.93,1631.26) 8155.93,1506.26 1610.93,1506.26 cw(c1610.93,1611.26) 1505.93,1611.26 1505.93,2741.26 cw(c1580.93,2741.26) 1580.93,2816.26 4325.93,2816.26 ccw(c4325.93,2956.26) 4465.93,2956.26 4465.93,3701.26 cw(c4595.93,3701.26) 4595.93,3831.26 5885.93,3831.26 cw(c5885.93,3696.26) 6020.93,3696.26 6020.93,3586.26 ccw(c6260.93,3586.26) 6260.93,3346.26 8080.93,3346.26 cw(c8080.93,3146.26) 8280.93,3146.26 8280.93,1631.26

## Keep-outs
Keep-Out Layer:
  lines w10: 1505,1623.11 ccw(c1623.11,1623.11) 1623.11,1505 ; 1505,4221.54 cw(c1623.11,4221.54) 1623.11,4339.65 ; 8166.42,1505 ccw(c8166.42,1623.11) 8284.53,1623.11 ; 8166.42,4339.65 cw(c8166.42,4221.54) 8284.53,4221.54

## Silkscreen, mask and mechanical layers (free items; w line width, h text height)
Top Overlay:
  text "Q2.0" at 3315.93,3866.26 h40
  text "Q2.1" at 3470.89,3866.26 h40
  text "Q2.2" at 3609.35,3866.26 h40
  text "Q2.3" at 3764.31,3866.26 h40
  text "Q2.4" at 3919.27,3866.26 h40
  text "Q2.5" at 4075.93,3866.26 h40
  text "Q1.0" at 2220.93,3861.26 h40
  text "Q1.1" at 2379.83,3861.26 h40
  text "Q1.2" at 2522.43,3861.26 h40
  text "Q1.3" at 2681.33,3861.26 h40
  text "Q1.4" at 2840.23,3861.26 h40
  text "Q1.5" at 3000.93,3861.26 h40
  text "+10V" at 7305.64,3861.26 h40
  text "AVI" at 7490.93,3861.26 h40
  text "GND" at 7625.93,3861.26 h40
  text "DCM" at 7781.03,3861.26 h40
  text "D0" at 7939.83,3861.26 h40
  text "D1" at 8055.64,3861.26 h40
  text "+10V" at 6160.64,3856.26 h40
  text "AVI" at 6345.93,3856.26 h40
  text "GND" at 6480.93,3856.26 h40
  text "DCM" at 6636.03,3856.26 h40
  text "D0" at 6794.83,3856.26 h40
  text "D1" at 6910.64,3856.26 h40
  text "+24V" at 1699.41,3736.5 h50 r8
  text "PGND" at 1925.93,3736.26 h50
  text "DEKATECH" at 1905.93,3066.26 h80
  text "info@dekamakina.com.tr" at 1906.88,3010.52 h24
  text "+90 538 489 05 52" at 1905.93,2964.26 h24
  text "Mert Gurdogan" at 1915.39,2912.59 h24 r358
  text "DEKATECH POWDER ROBOT" at 2785.93,2276.26 h80
  text "V1_0" at 3320.93,2209.26 h24
  text "GND" at 1875.93,2036.26 h50 r90
  text "+5V" at 1985.93,2031.26 h50 r90
  text "A1" at 5309.6,1974.09 h40 r69
  text "External_1" at 3530.93,1966.26 h50
  text "A2" at 5575.93,1966.26 h40
  text "B2" at 5705.93,1966.26 h40
  text "B1" at 5432.66,1964.65 h40
  text "External_2" at 4130.93,1961.26 h50
  text "I0.0" at 6070.93,1961.26 h40
  text "I0.1" at 6211.13,1961.26 h40
  text "I0.2" at 6334.93,1961.26 h40
  text "I0.3" at 6475.13,1961.26 h40
  text "I0.4" at 6615.33,1961.26 h40
  text "I0.5" at 6757.33,1961.26 h40
  text "I0.6" at 6897.53,1961.26 h40
  text "I0.7" at 7035.93,1961.26 h40
  text "PGND" at 7170.93,1961.26 h40
Bottom Overlay:
  rectangle: 1510.93,2821.26 2310.93,2941.26
  text "dekamakina.com.tr" at 5610.93,2141.26 h100